# EAGLE board accelerometer (EAGLE 6.4)
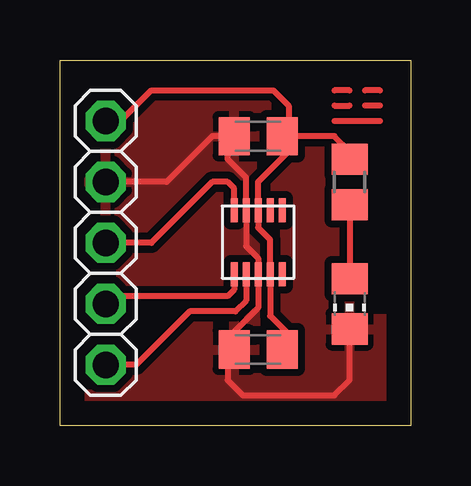
[diagram p0: board, top side]

Size 14.61 x 15.24 mm. Coordinates in mm from the lower left corner, seen from the top.
Outline: 0,0 0,15.24 14.61,15.24 14.61,0 0,0
Copper layers (1*16): Top 0.035mm / dielectric 1.5mm / Bottom 0.035mm
Design rules "default": minimum track width 10mil, minimum drill 24mil, track to track 8mil, track to pad 8mil, pad to pad 8mil, via to via 8mil, smd to smd 8mil, copper to edge 40mil, drill to drill 8mil, minimum pad ring 10mil, minimum via ring 8mil, stop-mask expansion 4mil, vias tented up to drill 0mil, thermal gap 10mil
tRestrict: area 9.5,12.7 to 10.8,14; area 13.3,5.1 to 14,5.7

## Footprints (pad centres in the part's own frame; a part is rotated, then mirrored left to right if it is on the bottom)
C0805K = smd 1.3 x 1.6: 1 -1,0; 2 1,0
1X05 = drill 1.1 pad 1.676 octagon: 1 -5.08,0; 2 -2.54,0; 3 0,0; 4 2.54,0; 5 5.08,0
CHIP-LED0805 = smd 1.5 x 1.3: A 0,-1.05; C 0,1.05
R0805 = smd 1.3 x 1.5: 1 -0.95,0; 2 0.95,0
DFN-10-HAND = smd 0.3 x 1: P$1 -1,-1.37; P$2 -0.5,-1.37; P$3 0,-1.37; P$4 0.5,-1.37; P$5 1,-1.37; P$6 1,1.31; P$7 0.5,1.31; P$8 0,1.31; P$9 -0.5,1.31; P$10 -1,1.31

## Placement (x,y rotation side)
C1  [C0805K]  8.26,12.06 180 top
C2  [C0805K]  8.26,3.17 180 top
JP1  [1X05]  1.91,7.62 90 top
LED1  [CHIP-LED0805]  12.06,5.08 180 top
R1  [R0805]  12.06,10.16 90 top
U$1  MMA7660DFN-10-HAND  [DFN-10-HAND]  8.26,7.62 180 top

## Library data of the parts
C1 C2 JP1 LED1 R1 = accelerometer
U$1 = mma7660

## Nets
+3V3: C1.1 C2.1 JP1.5 R1.2 U$1.P$3 U$1.P$9
/INT: JP1.3 U$1.P$5
GND: C1.2 C2.2 JP1.4 LED1.C U$1.P$4 U$1.P$8
N$1: LED1.A R1.1
SCL: JP1.2 U$1.P$6
SDA: JP1.1 U$1.P$7

## Tracks (layer width: path | path; a pad name or v marks a point on that pad's centre or on a via)
+3V3
  Top 0.254: JP1.5 2.54,12.7 3.81,13.97 8.89,13.97 9.53,13.34 9.53,12.06 11.43,12.06 12.06,11.43 R1.2 | 9.53,11.7 C1.1 | 9.53,11.79 9.53,11.43 8.26,10.16 U$1.P$3 8.26,8.26 8.76,7.75 U$1.P$9 8.76,4.58 9.53,3.81 9.53,3.44
  Top 0.305: 9.53,11.7 9.53,12.06 C1.1 9.53,11.79 | 9.53,3.44 C2.1
/INT
  Top 0.254: U$1.P$5 7.25,9.89 6.99,10.16 6.35,10.16 3.81,7.62 JP1.3
GND
  Top 0.254: 7.03,3.7 6.99,3.81 6.99,1.91 7.62,1.27 11.43,1.27 12.06,1.91 LED1.C | 7.03,3.7 C2.2 | C1.2 6.35,12.06 4.45,10.16 JP1.4 | 7.03,3.7 8.26,4.92 U$1.P$8 8.26,6.99 7.76,7.49 U$1.P$4 7.76,10.34 6.99,11.11 6.99,11.79
  Top 0.305: 6.99,11.79 C1.2
  pour Top (isolate 0.305): 14.61,0 14.61,15.24 0,15.24 0,0
N$1
  Top 0.254: R1.1 LED1.A
N$3
  Top 0.254: 11.43,12.7 13.34,12.7
N$5
  Top 0.254: 11.43,13.34 12.06,13.34
N$6
  Top 0.254: 13.34,13.34 12.7,13.34
N$7
  Top 0.254: 13.34,13.97 12.7,13.97
N$8
  Top 0.254: 12.06,13.97 11.43,13.97
SCL
  Top 0.254: U$1.P$6 7.25,5.67 6.99,5.4 2.22,5.4 JP1.2
SDA
  Top 0.254: U$1.P$7 7.76,5.21 7.3,4.76 5.4,4.76 3.17,2.54 JP1.1